# Altium PCB PCB_XL6009.PcbDoc
Units mm, origin at the board's own origin, x right, y up, seen from the top; angles counter-clockwise.
Board outline 47.63 x 30.21 mm, 2 copper layers (Top Layer, Bottom Layer); 9 components, 5 nets, 33 pads, 1 vias.
Unrouted connection lines stored in the file: 1.
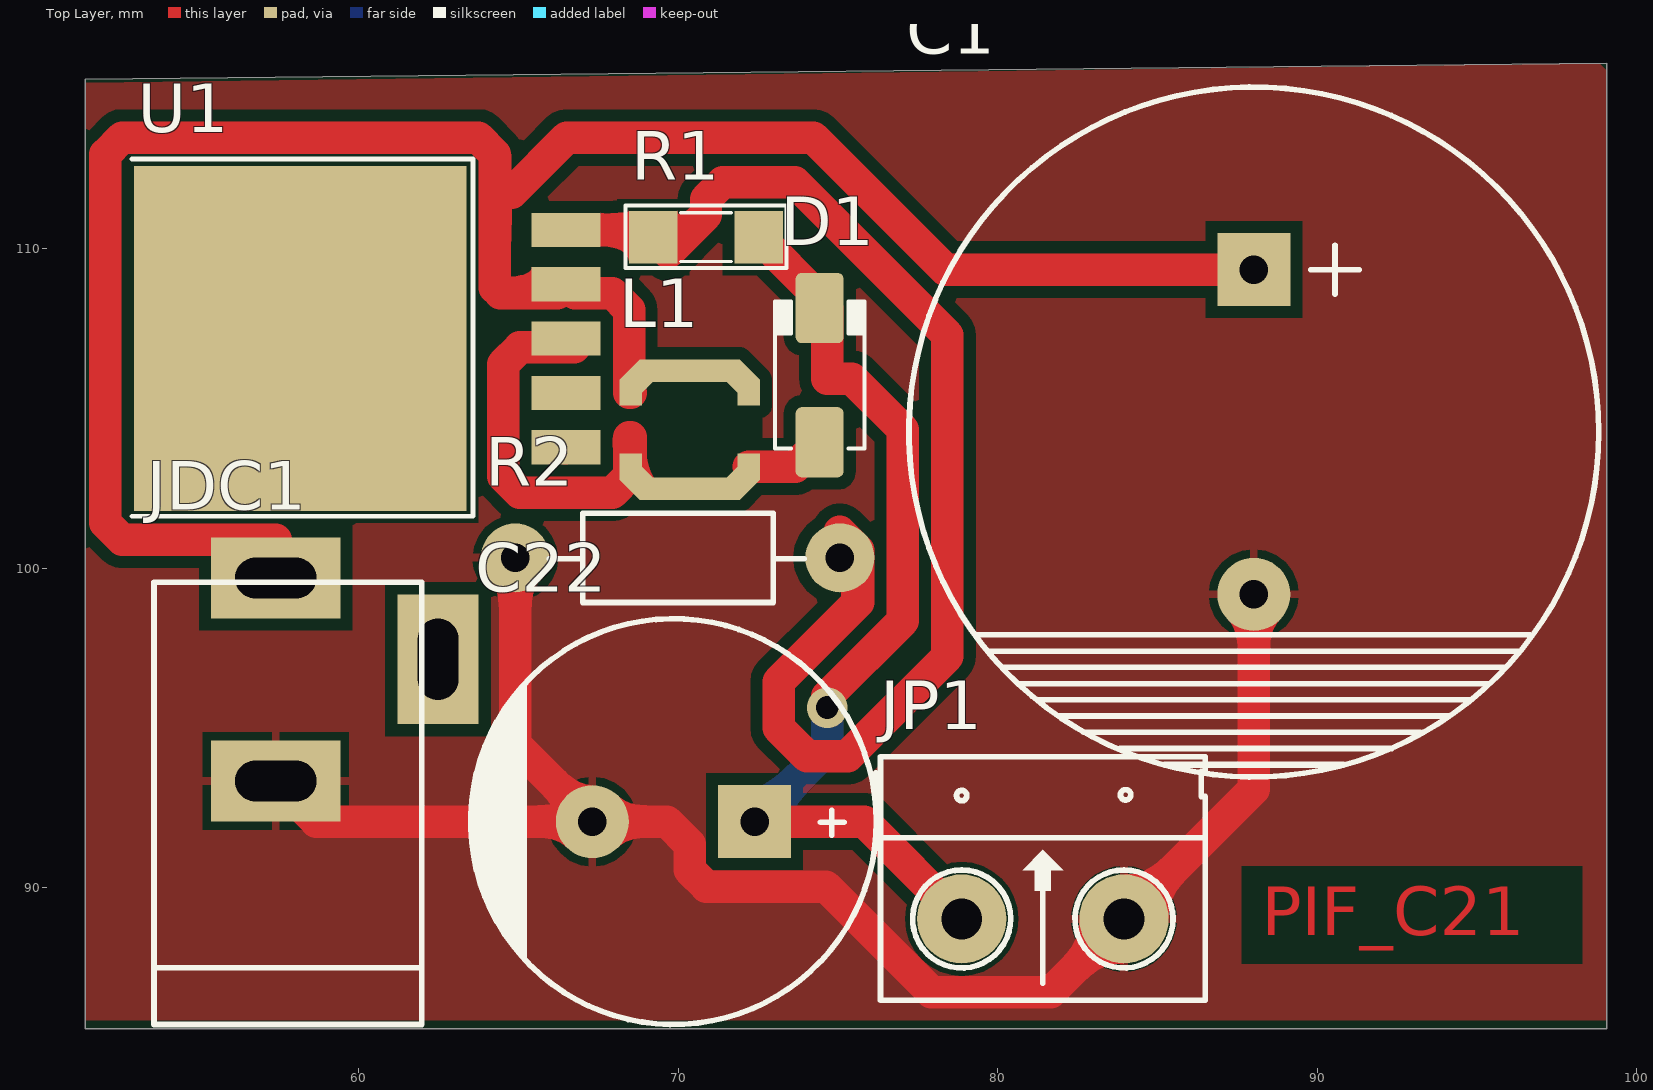
[diagram p0: Top Layer view]
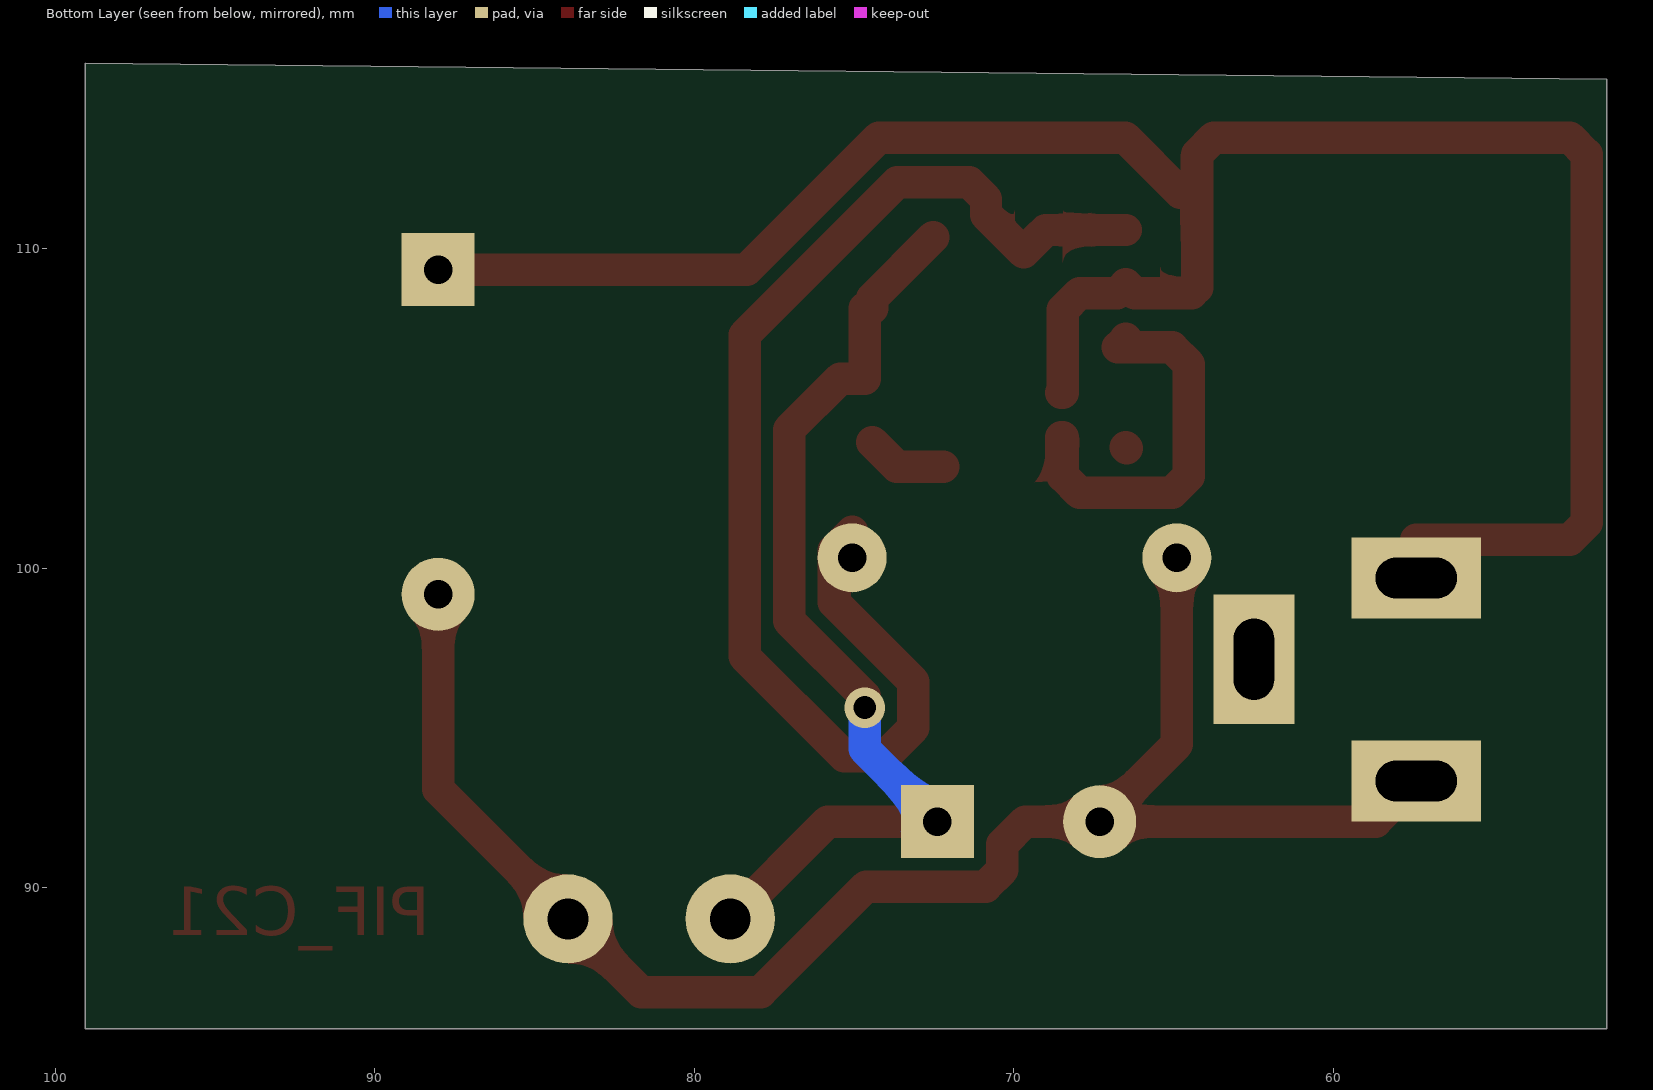
[diagram p1: Bottom Layer view, seen from below]
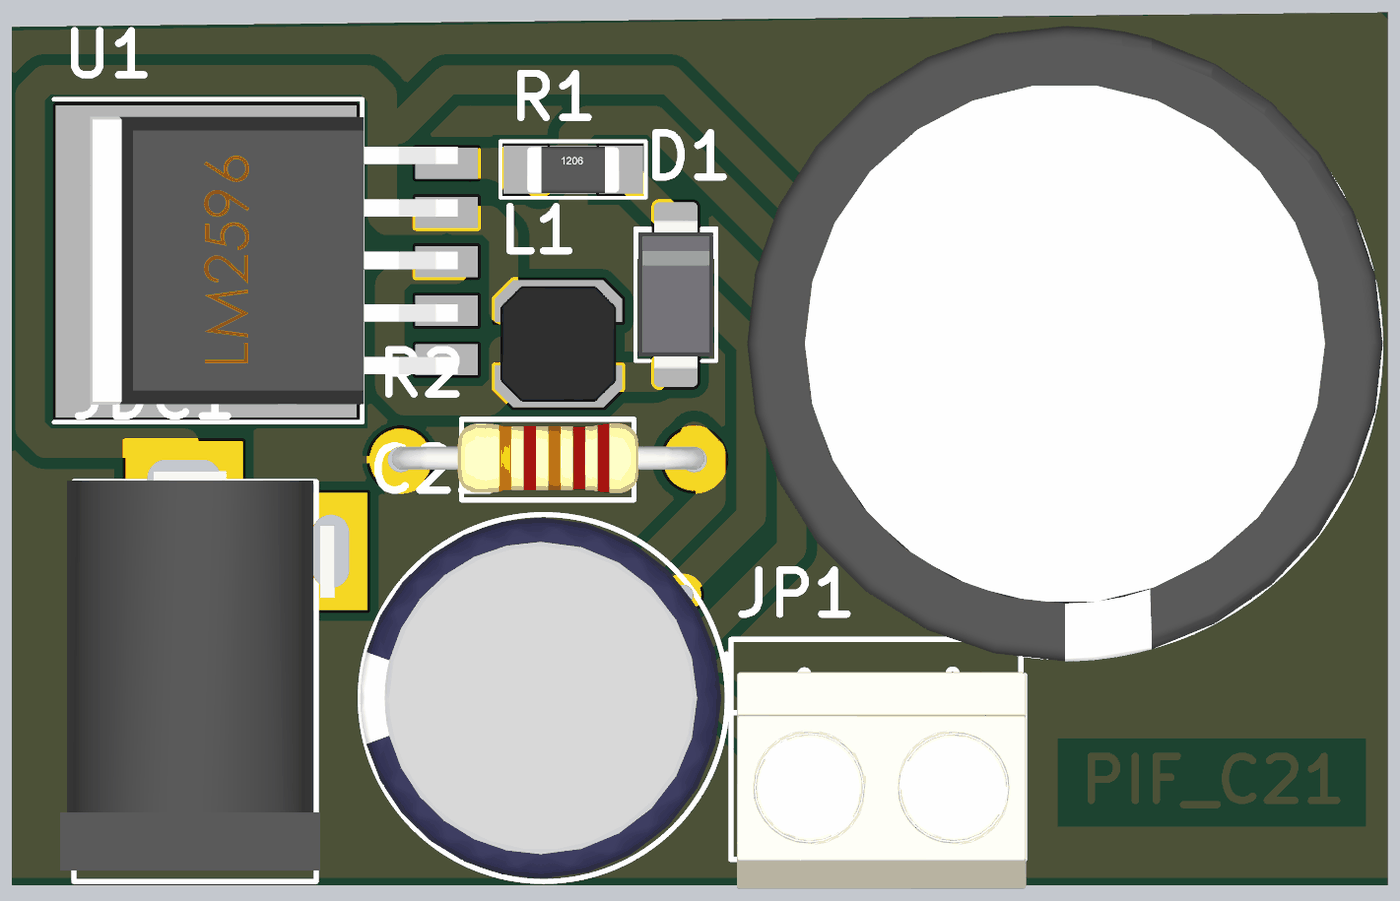
[diagram p2: 3D render of the assembled board from above, using the file's embedded part models]

## Layer stack, top to bottom
Top Solder: solder mask 0.0102, Solder Resist, Dk 3.5
Top Layer: signal copper 0.0356
Dielectric 1: dielectric 0.32, FR-4, Dk 4.8
Bottom Layer: signal copper 0.0356
Bottom Solder: solder mask 0.0102, Solder Resist, Dk 3.5

## Board outline
51.435,115.311 51.435,85.598 99.06,85.598 99.06,115.812

## Design rules (kind name [scope] priority, off if disabled: settings)
Clearance [All] p1: gap=0.381 ignorepadtopadclearanceinfootprint=FALSE
PolygonConnect [All] p1: connectstyle=Relief reliefconductorwidth=0.254 reliefentries=4 polygonreliefangle="90 Angle" airgapwidth=0.254
RoutingVias [All] p1: holewidth=0.711 width=1.27 viastyle="Through Hole" minholewidth=0.711 minwidth=1.27 maxholewidth=0.711 maxwidth=1.27
SolderMaskExpansion [All] p1: expansion=0.102
Width [All] p1: maxlimit=2.032 minlimit=0.508 preferedwidth=1.016
30 further rules are at their usual default settings.

## Classes and differential pairs
component class Sheet1_buck&boost: C1 C22 D1 JDC1 JP1 L1 R1 R2

## Components (designator, comment, footprint, x,y, rotation, side; value= is the part's Value field where it differs from the comment)
C1 "4700uF/50V" CP4/8.5 88.011,109.347 r270 top
C22 "Cap Pol3" CP2/5 72.39,92.075 r180 top value=220uF/50V
D1 "Diode  Schottky 1N5819" DO-214AC 74.422,106.045 r90 top value=1N4007
JDC1 "Jac DC" DC-IN 59.944,96.52 r90 top
JP1 "Header 2_1" HED2 78.867,89.027 r0 top value="Header 2"
L1 "33uh" IND_COILCRAFT_LPS4018 70.358,104.339 r270 top value=120µ
R1 "13.8k" SM-RES-1206 69.215,110.363 r0 top value="R1/4W - 1K"
R2 "Resistor 1/4W" "RES 1/2W" 64.897,100.33 r0 top value=1K
U1 "XL6009" LM2596 66.491,103.788 r90 top

## Footprints (in the part's own frame and the unit in brackets; to place one, negate y for a bottom-side part, rotate by r counter-clockwise, add the part's x,y. Pads: shape width x height; smd on the part's side, far side on the other; paste and mask are expansions set on the pad)
CP2/5 [mil] "Tu hoa 1000uF/25V,50V"
  rect 90x90 hole 35: 1(0,0)
  round 90 hole 35: 2(200,0)
  silkscreen extent -150,-250 350,250, body extent -142,-246 350,246, height 984
CP4/8.5 [mil] "Tu hoa 4700uF/50V"
  rect 90x90 hole 35: 1(0,0)
  round 90 hole 35: 2(400,0)
  silkscreen extent -225,-425 625,425, body extent -236,-438 630,428, height 984
DC-IN [mil] "Jac DC input"
  rect 100x160 hole 50 slot 100 at 90 deg: 1(125,100) 2(-125,100)
  rect 160x100 hole 50 slot 100 at 0 deg: 3(25,-100)
  silkscreen extent -425,-80 120,250, body extent -410,-105 134,269, height 434
DO-214AC [mm] "JEDEC DO214 variation AC. SMA"
  round 0.508 on Mech15: 0(0,0)
  rrect25% 2.2x1.5 smd: A(-2.1,0) K(2.1,0)
  silkscreen extent -2.3,-1.4 2.3,1.4, body extent -2.6,-1.3 2.6,1.3, height 2.42
HED2 [mil] "Header 2, 2 pin, hight 300mil, Pin to Pin 200, Colour Green"
  round 110 hole 50: 1(0,0) 2(200,0)
  silkscreen extent -106,-100 300,200, body extent -92,-140 302,155, height 394
IND_COILCRAFT_LPS4018 [mm] "Shielded Power Inductor, Body 4.0x4.0x1.8mm"
  round 0.5 on Mech15: 0(0,0)
  rrect1% 0.7x3.124 smd: 1(-1.85,0) 2(1.85,0)
  rrect1% 0.786x0.902 smd rot 135: 1(-1.603,1.603) 2(1.603,-1.603)
  rrect1% 0.786x0.902 smd rot 45: 1(-1.603,-1.603) 2(1.603,1.603)
  rrect1% 0.812x0.7 smd: 1(-1.156,1.85) 1(-1.156,-1.85) 2(1.156,1.85) 2(1.156,-1.85)
  Top Layer pour cut-out: -1.524,2.286 1.524,2.286 1.524,-2.286 -1.524,-2.286
  body extent -2,-2 2,2, height 1.79
LM2596 [mm]
  rect 1.07x2.16 smd: 1(0,0) 2(1.7,0) 3(3.4,0) 4(5.1,0) 5(6.8,0)
  rect 10.8x10.41 smd: 6(3.4,8.325)
  silkscreen extent -2.16,2.92 9.02,13.59, body extent -1.57,-0.39 8.43,12.36, height 4.3
"RES 1/2W" [mil] "R 1/2W, 2 pin, 300mil"
  round 85 hole 35: 1(0,0) 2(400,0)
  silkscreen extent 42,-55 356,55, body extent -12,-45 414,49, height 91
SM-RES-1206 [mil]
  rect 60x65 smd: 1(0,0) 2(130,0)
  silkscreen extent -34,-38 164,39, body extent 2,-31 128,32, height 40

## Part data
C1: library part CP7, "Cap 4700uF/50V"
C22: "Polarized Capacitor (Surface Mount)", LatestRevisionDate=17-Jul-2002, LatestRevisionNote="Re-released for DXP Platform.", PackageReference=C0805, Publisher="Altium Limited"
D1: "Diode 1A"
JDC1: library part DCIN, "Jac DC input"
JP1: "Header, 2-Pin", Manufacturer="Generic Components", Class=Connector
L1: library part INDC_120u_LPS4018, "Inductor shielded 120uH 300mA LPS4018 SMD", Current=300mA, DC Resistance (DCR)="1.6 Ohm Max", Frequency - Self Resonant=9MHz, Frequency - Test=100kHz, Manufacturer 1=Coilcraft, Manufacturer Part Number 1=LPS4018-124ML, Package / Case=LPS4018, Ratings="300 mArms", Supplier Part Number 1=LPS4018-124MLC, Tolerance=±20%, Material - Core=Ferrite, SCDType=spec, Supplier 1=Coilcraft, Type="Ferrite Core"
R1: library part R, "Resistor 1/4W"
R2: library part RES
U1: "SMD"

## Via types
v1: diameter 1.27, hole 0.711, Top Layer to Bottom Layer, 1 vias

## Nets (pads, with @x,y where several pads share a name; then routed paths per layer and width w, separated by ;. In a path a pad name is that pad's centre, name@x,y a point inside that pad or via, vN(x,y) a via of type N, cw(c..) or ccw(c..) an arc to the next point about the centre after c; other vN are vias at no path point)
GND: C1.2 C22.2 JDC1.2 JP1.2 R2.1 U1.1 | length 51.8
  Top Layer w1.016: JDC1.2 58.674,92.075 C22.2 ; R2.1 64.897,94.488 C22.2 ; U1.1@66.464,103.761 U1.1 ; C1.2 88.011,93.091 JP1.2 81.661,86.741 77.92,86.741 74.618,90.043 70.879,90.043 70.358,90.564 70.358,91.362 69.645,92.075 C22.2
NetC22_1: C22.1 D1.K JP1.1 R1.2 | length 30.4
  Top Layer w1.016: C22.1 75.819,92.075 JP1.1 ; R1.2 74.422,108.458 D1.K 74.664,108.145 74.664,105.934 75.43,105.934 77.025,104.339 77.025,98.361 74.664,96 v1(74.664,95.643)
  Bottom Layer w1.016: C22.1 74.664,94.349 v1(74.664,95.643)
NetD1_A: D1.A L1.2 U1.3 | length 15.4
  Top Layer w1.016: U1.3 66.491,107.16 66.739,106.912 65.043,106.912 64.522,106.391 64.522,102.885 65.043,102.364 67.939,102.364 68.46,102.885 68.46,104.097 68.508,104.097 L1.2@68.508,103.183 ; L1.2@72.208,103.183 73.66,103.183 D1.A
NetR1_1: R1.1 R2.2 U1.5 | length 40.6
  Top Layer w1.016: U1.5 68.99,110.588 R1.1 69.69,109.888 70.866,111.065 70.866,111.557 71.387,112.078 73.647,112.078 78.422,107.302 78.422,97.246 75.295,94.119 74.033,94.119 73.14,95.012 73.14,96.452 75.629,98.94 75.629,100.567 75.057,101.138 R2.2
VCC: C1.1 JDC1.1 L1.1 U1.4 | length 68.6
  Top Layer w1.016: JDC1.1 57.404,100.899 52.593,100.899 52.072,101.42 52.072,112.956 52.593,113.477 63.739,113.477 64.26,112.956 64.26,111.76 ; L1.1@68.508,105.495 68.46,105.495 68.46,108.091 67.939,108.612 66.767,108.612 U1.4 66.215,108.612 64.434,108.612 64.26,108.786 64.26,111.76 ; C1.1 78.353,109.347 74.226,113.474 66.505,113.474 64.791,111.76 64.26,111.76
pads on no net: D1.0 JDC1.3 L1.0 U1.2 U1.6

## Polygon pours and split planes (outlines as drawn)
no net on Multi-Layer (solid): 57.785,88.138
no net on Multi-Layer (solid): 89.408,90.678
no net on Multi-Layer (solid): 73.533,105.156
GND on Top Layer "Top Layer-GND" (solid, pour order 0): 51.435,115.189 98.818,115.812 99.06,115.57 99.06,85.852 51.435,85.852

## Other copper
Top Layer:
  text "PIF_C21" at 88.265,88.519 h1.52
Multi-Layer:
  lines w0.254: 51.267,118.389 51.267,118.897 ; 52.791,118.135 51.267,118.643 ; 52.791,119.151 51.267,118.643 ; 67.183,118.643 51.267,118.643 ; 83.231,118.643 99.146,118.643 ; 97.622,118.135 99.146,118.643 ; 97.622,119.151 99.146,118.643 ; 99.146,118.389 99.146,118.897 ; 101.606,114.298 102.108,115.824 ; 101.721,87.12 102.235,85.598 ; 101.854,115.823 102.362,115.825 ; 101.981,85.597 102.489,85.599 ; 102.138,108.735 102.108,115.824 ; 102.205,92.687 102.235,85.598 ; 102.622,114.302 102.108,115.824 ; 102.737,87.124 102.235,85.598
  text "47.879 (mm)" at 67.437,117.729 h1.52
  text "30.226 (mm)" at 101.225,108.477 h1.52 r270.24

## Silkscreen, mask and mechanical layers (free items; w line width, h text height)
Mechanical 1:
  the board outline again, w0.489